# Altium PCB FMC-320U-A2.PcbDoc
Units mm, origin at the board's own origin, x right, y up, seen from the top; angles counter-clockwise.
Board outline 106 x 84 mm, 2 copper layers (Top Layer, Bottom Layer), stack 1.672 mm thick; 69 components, 47 nets, 200 pads, 43 vias.
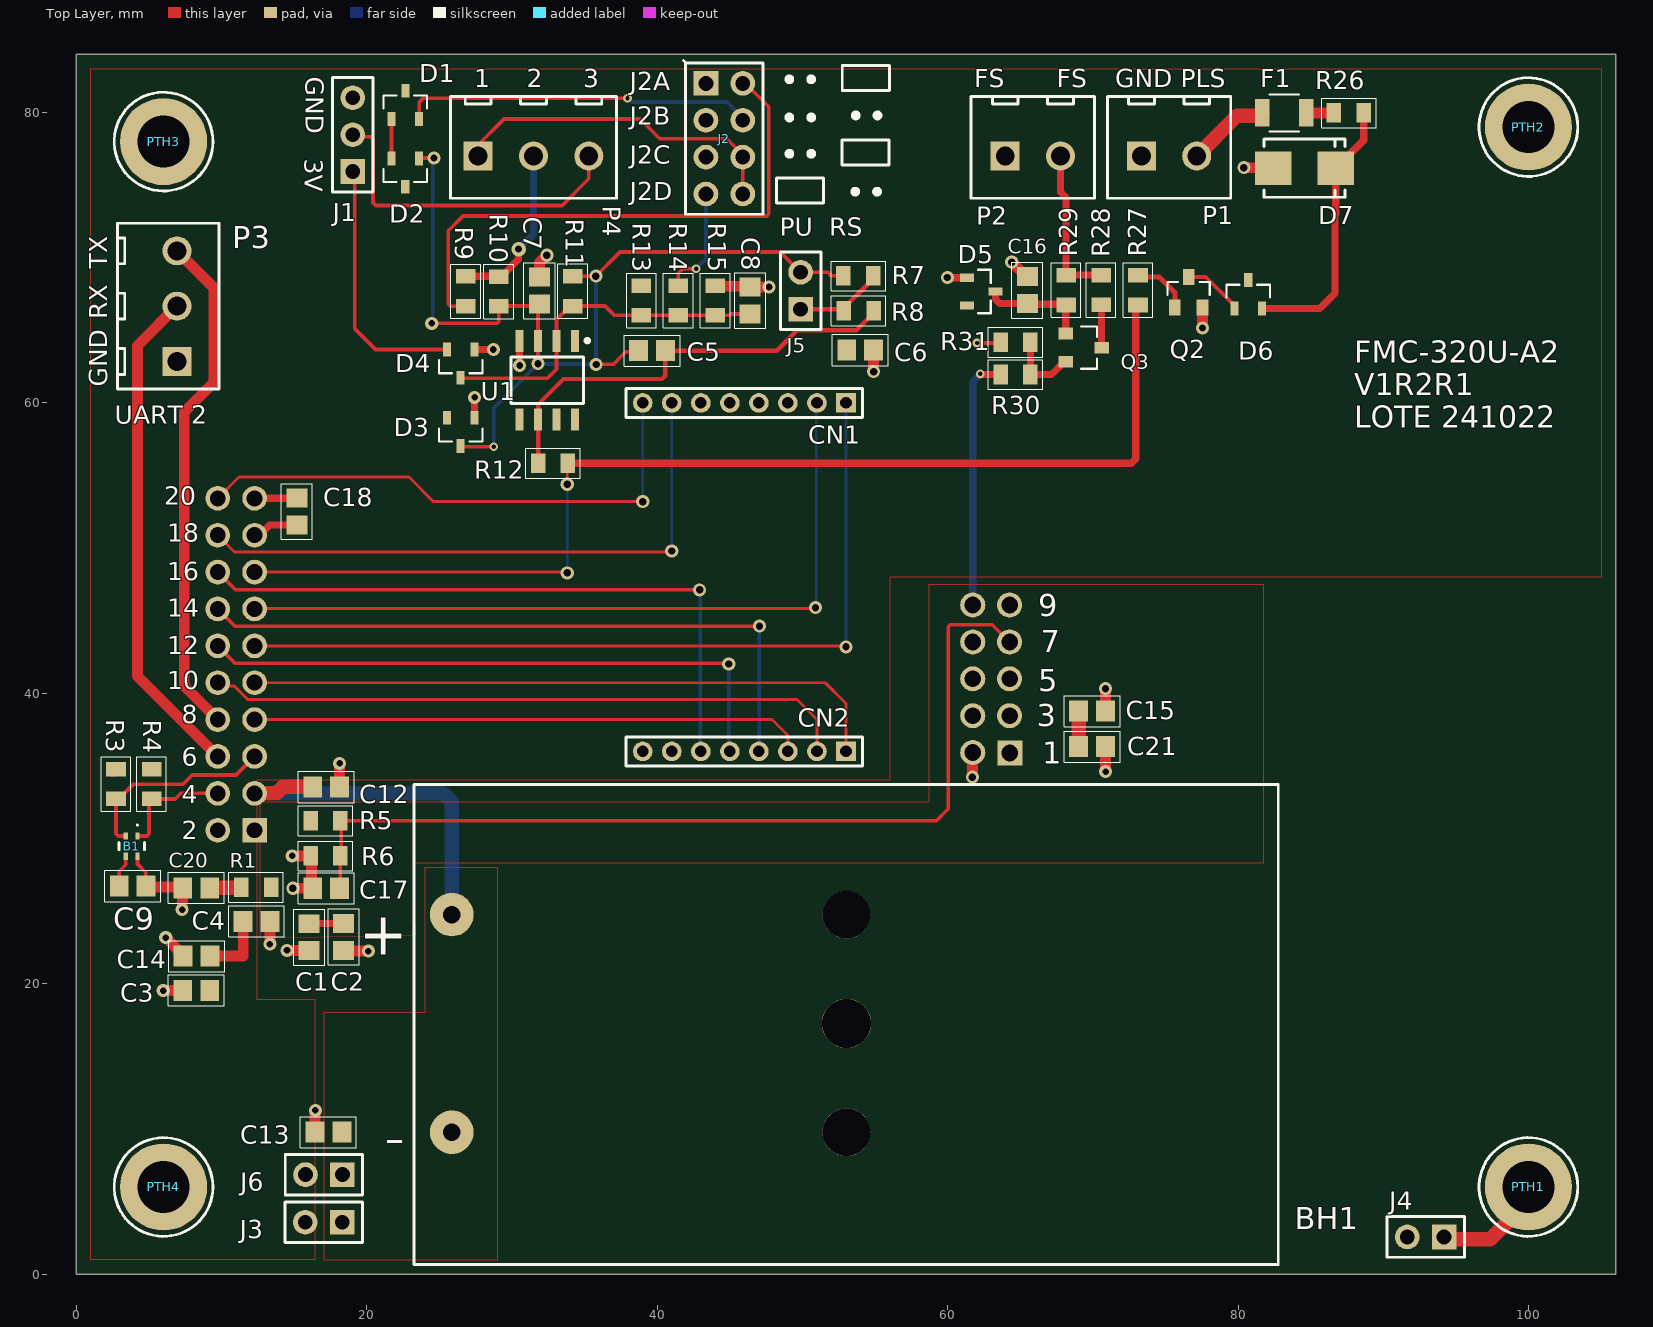
[diagram p0: Top Layer view]
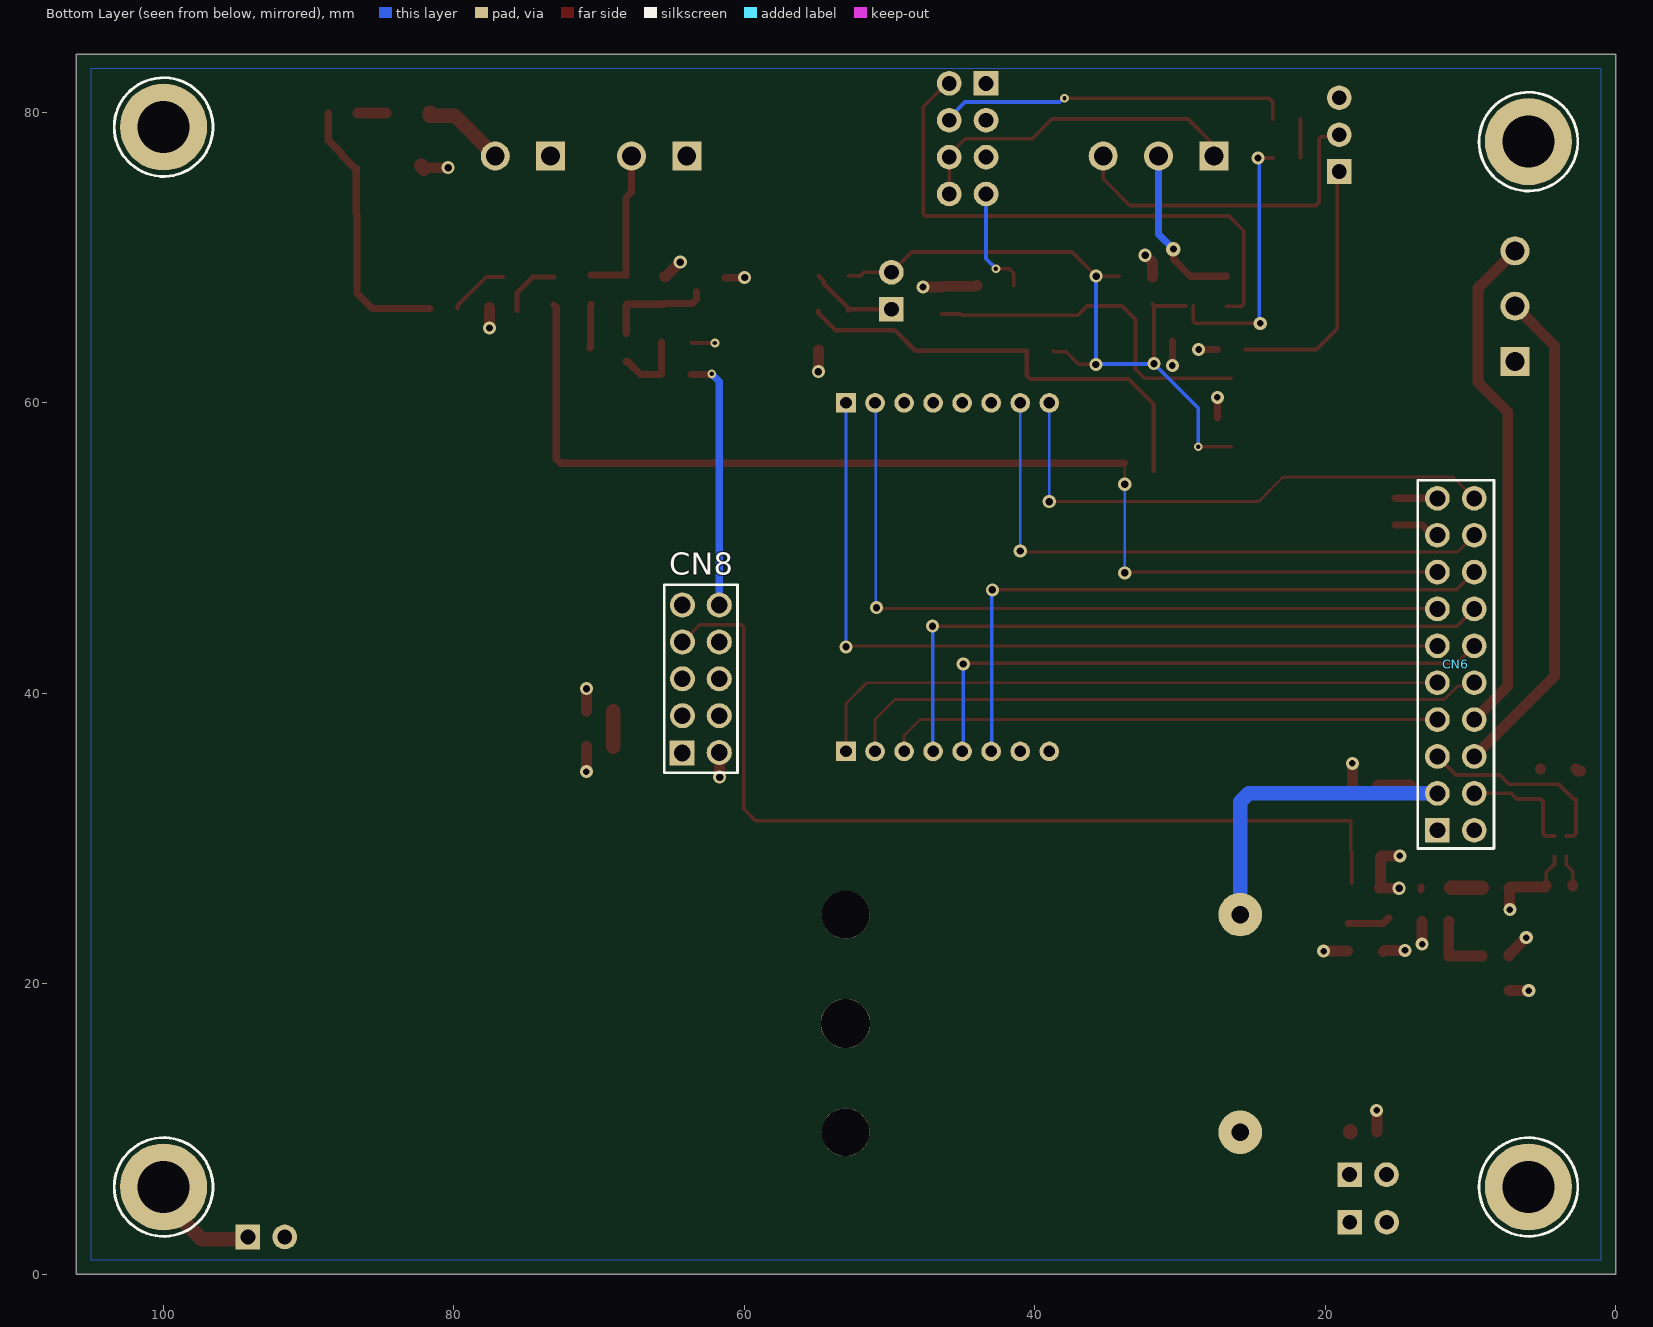
[diagram p1: Bottom Layer view, seen from below]

## Layer stack, top to bottom
Top Solder: solder mask 0.1, Solder Resist, Dk 3.5
Top Layer: signal copper 0.036
Dielectric 1: dielectric 1.6, FR-4, Dk 4.8
Bottom Layer: signal copper 0.036
Bottom Solder: solder mask 0.1, Solder Resist, Dk 3.5

## Board outline
0,0 0,84 106,84 106,0

## Design rules (kind name [scope] priority, off if disabled: settings)
AssemblyTestPointUsage [All] p0: scope1count=1 scope1_0_kind=Board scope1_0_value=Board scope2count=1 scope2_0_kind=Board scope2_0_value=Board commentlength=0
AssemblyTestpoint [All] p0: scope1count=1 scope1_0_kind=Board scope1_0_value=Board scope2count=1 scope2_0_kind=Board scope2_0_value=Board commentlength=0
BoardOutlineClearance [All] p0: scope1count=1 scope1_0_kind=Board scope1_0_value=Board scope2count=1 scope2_0_kind=Board scope2_0_value=Board commentlength=0 gap=0.25
BoardOutlineClearance [All] p1: gap=0.25 ignorepadtopadclearanceinfootprint=FALSE
Clearance [All] p0: scope1count=1 scope1_0_kind=Board scope1_0_value=Board scope2count=1 scope2_0_kind=Board scope2_0_value=Board commentlength=0 gap=0.2
Clearance [All] p1: gap=0.2 ignorepadtopadclearanceinfootprint=FALSE
ComponentClearance [All] p0: scope1count=1 scope1_0_kind=Board scope1_0_value=Board scope2count=1 scope2_0_kind=Board scope2_0_value=Board commentlength=0 gap=0.099 collisioncheckmode=3
ComponentClearance [All] p1: gap=0.099 collisioncheckmode=3 verticalgap=0.099 showdistances=FALSE
DiffPairsRouting [All] p0: scope1count=1 scope1_0_kind=Board scope1_0_value=Board scope2count=1 scope2_0_kind=Board scope2_0_value=Board commentlength=0
FabricationTestPointUsage [All] p0: scope1count=1 scope1_0_kind=Board scope1_0_value=Board scope2count=1 scope2_0_kind=Board scope2_0_value=Board commentlength=0 valid=0 allowmultiple=FALSE
FabricationTestpoint [All] p0: scope1count=1 scope1_0_kind=Board scope1_0_value=Board scope2count=1 scope2_0_kind=Board scope2_0_value=Board commentlength=0 side=3 testpointundercomponent=TRUE minsize=1.016 maxsize=2.54 preferedsize=1.524 minholesize=0 maxholesize=1.016 preferedholesize=0.813 testpointgrid=0.025
FanoutControl Fanout_BGA [All] p0 off: scope1count=1 scope1_0_kind=Board scope1_0_value=Board scope2count=1 scope2_0_kind=Board scope2_0_value=Board commentlength=69 // Protel DXP Scope 1 Expression Was: IsBGA   Fanout_BGA (Default Rule)
FanoutControl Fanout_LCC [All] p0 off: scope1count=1 scope1_0_kind=Board scope1_0_value=Board scope2count=1 scope2_0_kind=Board scope2_0_value=Board commentlength=69 // Protel DXP Scope 1 Expression Was: IsLCC   Fanout_LCC (Default Rule)
FanoutControl Fanout_SOIC [All] p0 off: scope1count=1 scope1_0_kind=Board scope1_0_value=Board scope2count=1 scope2_0_kind=Board scope2_0_value=Board commentlength=71 // Protel DXP Scope 1 Expression Was: IsSOIC   Fanout_SOIC (Default Rule)
FanoutControl Fanout_Small [All] p0 off: scope1count=1 scope1_0_kind=Board scope1_0_value=Board scope2count=1 scope2_0_kind=Board scope2_0_value=Board commentlength=84 // Protel DXP Scope 1 Expression Was: (CompPinCount < 5)   Fanout_Small (Default Rule)
FanoutControl Fanout_Default [All] p0: scope1count=1 scope1_0_kind=Board scope1_0_value=Board scope2count=1 scope2_0_kind=Board scope2_0_value=Board commentlength=30 // Fanout_Default (Default Rule)
Height [All] p0: scope1count=1 scope1_0_kind=Board scope1_0_value=Board scope2count=1 scope2_0_kind=Board scope2_0_value=Board commentlength=0
HoleSize [All] p0: scope1count=1 scope1_0_kind=Board scope1_0_value=Board scope2count=1 scope2_0_kind=Board scope2_0_value=Board commentlength=0 absolutevalues=TRUE maxlimit=10 minlimit=0.3 maxpercent=80.000 minpercent=20.000
HoleSize [All] p1: absolutevalues=TRUE maxlimit=10 minlimit=0.3 maxpercent=80.000 minpercent=20.000
HoleToHoleClearance [All] p0: scope1count=1 scope1_0_kind=Board scope1_0_value=Board scope2count=1 scope2_0_kind=Board scope2_0_value=Board commentlength=0
LayerPairs [All] p0: scope1count=1 scope1_0_kind=Board scope1_0_value=Board scope2count=1 scope2_0_kind=Board scope2_0_value=Board commentlength=0 enforce=TRUE
MinimumSolderMaskSliver [All] p0: scope1count=1 scope1_0_kind=Board scope1_0_value=Board scope2count=1 scope2_0_kind=Board scope2_0_value=Board commentlength=0
MinimumSolderMaskSliver [All] p1: minsoldermaskwidth=0.2
NetAntennae [All] p0: scope1count=1 scope1_0_kind=Board scope1_0_value=Board scope2count=1 scope2_0_kind=Board scope2_0_value=Board commentlength=0
PasteMaskExpansion [All] p0: scope1count=1 scope1_0_kind=Board scope1_0_value=Board scope2count=1 scope2_0_kind=Board scope2_0_value=Board commentlength=0 expansion=0
PlaneClearance [All] p0: scope1count=1 scope1_0_kind=Board scope1_0_value=Board scope2count=1 scope2_0_kind=Board scope2_0_value=Board commentlength=0 clearance=0.25
PlaneClearance [All] p1: clearance=0.25
PlaneConnect [All] p0: scope1count=1 scope1_0_kind=Board scope1_0_value=Board scope2count=1 scope2_0_kind=Board scope2_0_value=Board commentlength=0 planeconnectstyle=Relief reliefexpansion=0.508 reliefentries=4 reliefconductorwidth=0.254 reliefairgap=0.254
PolygonConnect [All] p0: scope1count=1 scope1_0_kind=Board scope1_0_value=Board scope2count=1 scope2_0_kind=Board scope2_0_value=Board commentlength=0 connectstyle=Relief reliefconductorwidth=0.254 reliefentries=4 polygonreliefangle="90 Angle"
PolygonConnect [All] p1: connectstyle=Relief reliefconductorwidth=0.254 reliefentries=4 polygonreliefangle="90 Angle" airgapwidth=0.254
RoutingCorners [All] p0: scope1count=1 scope1_0_kind=Board scope1_0_value=Board scope2count=1 scope2_0_kind=Board scope2_0_value=Board commentlength=0 cornerstyle=45-Degree minsetback=2.54 maxsetback=2.54
RoutingLayers [All] p0: scope1count=1 scope1_0_kind=Board scope1_0_value=Board scope2count=1 scope2_0_kind=Board scope2_0_value=Board commentlength=0 top layer=Automatic bottom layer=Automatic
RoutingPriority [All] p0: scope1count=1 scope1_0_kind=Board scope1_0_value=Board scope2count=1 scope2_0_kind=Board scope2_0_value=Board commentlength=0
RoutingTopology [All] p0: scope1count=1 scope1_0_kind=Board scope1_0_value=Board scope2count=1 scope2_0_kind=Board scope2_0_value=Board commentlength=0 topology=Shortest
RoutingVias [All] p0: scope1count=1 scope1_0_kind=Board scope1_0_value=Board scope2count=1 scope2_0_kind=Board scope2_0_value=Board commentlength=0 holewidth=0.5 width=1 viastyle="Through Hole" minholewidth=0.3 minwidth=0.6 maxholewidth=0.9 maxwidth=1.2
RoutingVias [All] p1: holewidth=0.5 width=1 viastyle="Through Hole" minholewidth=0.3 minwidth=0.6 maxholewidth=0.9 maxwidth=1.2
ShortCircuit [All] p0: scope1count=1 scope1_0_kind=Board scope1_0_value=Board scope2count=1 scope2_0_kind=Board scope2_0_value=Board commentlength=0 allowed=FALSE
SilkToBoardRegionClearance [All] p0: scope1count=1 scope1_0_kind=Board scope1_0_value=Board scope2count=1 scope2_0_kind=Board scope2_0_value=Board commentlength=0
SilkToSilkClearance [All] p0: scope1count=1 scope1_0_kind=Board scope1_0_value=Board scope2count=1 scope2_0_kind=Board scope2_0_value=Board commentlength=0
SilkToSilkClearance [All] p1: silktosilkclearance=0.2
SilkToSolderMaskClearance [All] p0 off: scope1count=1 scope1_0_kind=Board scope1_0_value=Board scope2count=1 scope2_0_kind=Board scope2_0_value=Board commentlength=44 // Protel DXP Scope 1 Expression Was: IsPad
SilkToSolderMaskClearance [IsPad] p1: minsilkscreentomaskgap=0.2 clearancetoexposedcopper=TRUE
SolderMaskExpansion [All] p0: scope1count=1 scope1_0_kind=Board scope1_0_value=Board scope2count=1 scope2_0_kind=Board scope2_0_value=Board commentlength=0 expansion=0.102
SolderMaskExpansion [All] p1: expansion=0.102 istentingtop=FALSE
UnRoutedNet [All] p0: scope1count=1 scope1_0_kind=Board scope1_0_value=Board scope2count=1 scope2_0_kind=Board scope2_0_value=Board commentlength=0
UnpouredPolygon [All] p0: scope1count=1 scope1_0_kind=Board scope1_0_value=Board scope2count=1 scope2_0_kind=Board scope2_0_value=Board commentlength=0
Width [All] p0: scope1count=1 scope1_0_kind=Board scope1_0_value=Board scope2count=1 scope2_0_kind=Board scope2_0_value=Board commentlength=0 maxlimit=5 minlimit=0.2 preferedwidth=0.2
Width [All] p1: maxlimit=5 minlimit=0.2 preferedwidth=0.2
24 further rules are at their usual default settings.

## Components (designator, comment, footprint, x,y, rotation, side; value= is the part's Value field where it differs from the comment)
B1 "STS40-BD1B-R3" STS40BD1BR3 3.8,29.475 r270 top
BH1 "ENERGIZER L91" BATTERY_HOLDER_2XAA 53,17.25 r180 top
C1 "4.7uF" CAP_SM0805_YAGEOCC2_N 16.025,23.202 r270 top
C2 "100nF" CAP_SM0805_YAGEOCC2_N 18.4,23.225 r270 top
C3 "4.7uF" CAP_SM0805_YAGEOCC2_N 8.25,19.544 r180 top
C4 "100nF" CAP_SM0805_YAGEOCC2_N 12.4,24.3 r0 top
C5 "33pF" CAP_SM0805_YAGEOCC2_N 39.648,63.6 r0 top
C6 "1uF" CAP_SM0805_YAGEOCC2_N 53.976,63.649 r0 top
C7 "47nF" CAP_SM0805_YAGEOCC2_N 31.887,67.74 r90 top
C8 "47nF" CAP_SM0805_YAGEOCC2_N 46.402,67.056 r90 top
C9 "100nF" CAP_SM0805_YAGEOCC2_N 3.873,26.725 r180 top
C12 "100nF" CAP_SM0805_YAGEOCC2_N 17.198,33.55 r0 top
C13 "4.7uF" CAP_SM0805_YAGEOCC2_N 17.35,9.775 r180 top
C14 "100nF" CAP_SM0805_YAGEOCC2_N 8.275,21.9 r180 top
C15 "100nF" CAP_SM0805_YAGEOCC2_N 69.952,38.775 r0 top
C16 "100nF" CAP_SM0805_YAGEOCC2_N 65.49,67.772 r90 top
C17 "4.7uF" CAP_SM0805_YAGEOCC2_N 17.198,26.575 r180 top
C18 "4.7uF" CAP_SM0805_YAGEOCC2_N 15.175,52.525 r90 top
C20 "4.7uF" CAP_SM0805_YAGEOCC2_N 8.25,26.6 r180 top
C21 "4.7uF" CAP_SM0805_YAGEOCC2_N 69.952,36.325 r0 top
CN1 "DW200R-11-08-43" DW200R-11-08-43 46,60 r180 top
CN2 "DW200R-11-08-43" DW200R-11-08-43 46,36 r180 top
CN6 "DZ254R-22-20-63" "HEADER PIN 2X10" 11,42 r90 bottom locked
CN8 "" "HEADER PIN 2X5 MIRROR" 63,41 r270 bottom locked
D1 "BAV23S" BAV23S 22.65,80.521 r90 top
D2 "BAV23S" BAV23S 22.648,75.869 r270 top
D3 "BAV23S" BAV23S 26.459,58.008 r270 top
D4 "BAV23S" BAV23S 26.459,62.707 r270 top
D5 "BAV23S" BAV23S 62.315,67.67 r0 top
D6 "BAV23S" BAV23S 80.704,67.482 r90 top
D7 "SMBJ28CA-13-F" SMBJ28CA-13-F 84.58,76.165 r0 top
F1 "0ZCJ0005FF2E" 0ZCJ0005FF2E 83.183,79.975 r0 top
J1 "" "HEADER PIN 1X3" 19.025,78.475 r90 top
J2 "Usar equivalente" "HEADER PIN 2X4" 44.624,78.2 r270 top
J3 "Usar Equivalente" "HEADER PIN 1X2" 17.03,3.575 r180 top
J4 "Usar Equivalente" "HEADER PIN 1X2" 92.924,2.557 r180 top
J5 "Usar Equivalente" "HEADER PIN 1X2" 49.875,67.725 r90 top
J6 "Usar Equivalente" "HEADER PIN 1X2" 17.045,6.85 r180 top
P1 "WJ15EDGVC-3.81-2P" "HEADER PLUG 2" 75.25,77 r0 top
P2 "WJ15EDGVC-3.81-2P" "HEADER PLUG 2" 65.87,77 r0 top
P3 "WJ15EDGVC-3.81-3P" "HEADER PLUG 3" 6.925,66.665 r90 top
P4 "WJ15EDGVC-3.81-3P" "HEADER PLUG 3" 31.475,77 r0 top
PTH1 "PTH-3MM-M" PTH_M3_M 100,6 r0 top
PTH2 "PTH-3MM-M" PTH_M3_M 100,79 r0 top
PTH3 "PTH-3MM-M" PTH_M3_M 6,78 r0 top
PTH4 "PTH-3MM-M" PTH_M3_M 6,6 r0 top
Q2 "DMG3402" DMG3402L-7 76.6,67.575 r90 top
Q3 "DMG3401" DMG3401LSN-7 69.529,63.807 r0 top
R1 "10R" RES_SM0805_YAGEORC_N 12.375,26.65 r0 top
R3 "10K" RES_SM0805_YAGEORC_N 2.725,33.752 r90 top
R4 "10K" RES_SM0805_YAGEORC_N 5.175,33.75 r90 top
R5 "10M" RES_SM0805_YAGEORC_N 17.148,31.225 r180 top
R6 "10M" RES_SM0805_YAGEORC_N 17.148,28.8 r0 top
R7 "1M" RES_SM0805_YAGEORC_N 53.85,68.75 r0 top
R8 "1M" RES_SM0805_YAGEORC_N 53.872,66.355 r0 top
R9 "100K" RES_SM0805_YAGEORC_N 26.807,67.691 r270 top
R10 "10K" RES_SM0805_YAGEORC_N 29.093,67.679 r270 top
R11 "220K" RES_SM0805_YAGEORC_N 34.173,67.702 r90 top
R12 "1K" RES_SM0805_YAGEORC_N 32.816,55.854 r0 top
R13 "1M" RES_SM0805_YAGEORC_N 38.909,67.056 r90 top
R14 "10K" RES_SM0805_YAGEORC_N 41.449,67.056 r270 top
R15 "1M" RES_SM0805_YAGEORC_N 43.989,67.056 r270 top
R26 "47R" RES_SM0805_YAGEORC_N 87.628,79.975 r180 top
R27 "10K" RES_SM0805_YAGEORC_N 73.11,67.772 r90 top
R28 "1M" RES_SM0805_YAGEORC_N 70.57,67.783 r270 top
R29 "100K" RES_SM0805_YAGEORC_N 68.157,67.772 r270 top
R30 "1K" RES_SM0805_YAGEORC_N 64.677,61.957 r180 top
R31 "1M" RES_SM0805_YAGEORC_N 64.677,64.182 r0 top
U1 "MCP6541" MCP6541-E/SN 32.428,61.564 r270 top

## Footprints (in the part's own frame and the unit in brackets; to place one, negate y for a bottom-side part, rotate by r counter-clockwise, add the part's x,y. Pads: shape width x height; smd on the part's side, far side on the other; paste and mask are expansions set on the pad)
0ZCJ0005FF2E [mm]
  rect 1x1.9 smd: 1(-1.5,0) 2(1.5,0)
  silkscreen extent -1.02,-1.27 1.02,1.27
BATTERY_HOLDER_2XAA [mm]
  round 3 hole 1.2 mask+0: NEG(27.15,7.481) POS(27.15,-7.509)
  round 3.3 hole 3.3 unplated mask+0: ""(-0.03,7.481) ""(-0.03,-7.509)
  round 3.4 hole 3.4 unplated mask+0: ""(-0.03,-0.014)
  silkscreen extent -29.77,-16.47 29.74,16.59
BAV23S [mm]
  rect 0.95x0.56 smd: 1(-0.975,0.95) 2(-0.975,-0.95) 3(0.975,0)
  silkscreen extent -0.23,-1.5 0.66,1.5
CAP_SM0805_YAGEOCC2_N [mm] "Capacitor, Yageo CC Class2, SM0805, IPC Medium Density"
  rect 1.3x1.45 smd: 1(-0.927,0) 2(0.927,0)
  silkscreen extent -1.92,-1.07 1.92,1.07
DMG3401LSN-7 [mm]
  rect 1x0.8 smd: D(1.1,0) G(-1.4,0.975) S(-1.4,-0.975)
  silkscreen extent -0.35,-1.45 0.75,1.45
DMG3402L-7 [mm]
  rect 1.1x0.8 smd: D(1.1,0) G(-1,0.95) S(-1,-0.95)
  silkscreen extent -0.13,-1.45 0.75,1.45
DW200R-11-08-43 [mm]
  rect 1.35x1.35 hole 0.8: 1(-7,0)
  round 1.35 hole 0.8: 2(-5,0) 3(-3,0) 4(-1,0) 5(1,0) 6(3,0) 7(5,0) 8(7,0)
  silkscreen extent -8.15,-1 8.15,1
"HEADER PIN 1X2" [mm]
  rect 1.7x1.7 hole 1.02: 1(-1.27,0)
  round 1.7 hole 1.02: 2(1.27,0)
  silkscreen extent -2.67,-1.4 2.67,1.4
"HEADER PIN 1X3" [mm]
  rect 1.7x1.7 hole 1.02: 1(-2.54,0)
  round 1.7 hole 1.02: 2(0,0) 3(2.54,0)
  silkscreen extent -3.94,-1.4 3.94,1.4
"HEADER PIN 2X4" [mm]
  rect 1.7x1.7 hole 1.02: 1(-3.81,-1.27)
  round 1.7 hole 1.02: 2(-3.81,1.27) 3(-1.27,-1.27) 4(-1.27,1.27) 5(1.27,-1.27) 6(1.27,1.27) 7(3.81,-1.27) 8(3.81,1.27)
  silkscreen extent -5.38,-2.83 5.21,2.67
"HEADER PIN 2X5 MIRROR" [mm]
  rect 1.725x1.725 hole 1.15: 1(5.105,-1.28)
  round 1.725 hole 1.15: 2(5.08,1.27) 3(2.54,-1.27) 4(2.54,1.27) 5(0,-1.27) 6(0,1.27) 7(-2.54,-1.27) 8(-2.54,1.27) 9(-5.08,-1.27) 10(-5.08,1.27)
  silkscreen extent -6.48,-2.52 6.47,2.53
"HEADER PIN 2X10" [mm]
  rect 1.7x1.7 hole 1.1: 1(-11.43,1.27)
  round 1.7 hole 1.1: 2(-11.43,-1.27) 3(-8.89,1.27) 4(-8.89,-1.27) 5(-6.35,1.27) 6(-6.35,-1.27) 7(-3.81,1.27) 8(-3.81,-1.27) 9(-1.27,1.27) 10(-1.27,-1.27) 11(1.27,1.27) 12(1.27,-1.27) 13(3.81,1.27) 14(3.81,-1.27) 15(6.35,1.27) 16(6.35,-1.27) 17(8.89,1.27) 18(8.89,-1.27) 19(11.43,1.27) 20(11.43,-1.27)
  silkscreen extent -12.67,-2.63 12.67,2.63
"HEADER PLUG 2" [mm] "Connector; Header; 2 Position"
  rect 2x2 hole 1.3 mask+0: 1(-1.905,0)
  round 2 hole 1.3 mask+0: 2(1.905,0)
  silkscreen extent -4.25,-2.9 4.25,4.1
"HEADER PLUG 3" [mm] "Connector; Header; 3 Position"
  rect 2x2 hole 1.3 mask+0: 1(-3.81,0)
  round 2 hole 1.3 mask+0: 2(0,0) 3(3.81,0)
  silkscreen extent -5.71,-2.9 5.71,4.1
MCP6541-E/SN [mm]
  rect 1.5x0.55 smd: 1(-2.7,1.905) 2(-2.7,0.635) 3(-2.7,-0.635) 4(-2.7,-1.905) 5(2.7,-1.905) 6(2.7,-0.635) 7(2.7,0.635) 8(2.7,1.905)
  silkscreen extent -2.85,-2.5 1.6,2.88
PTH_M3_M [mm]
  round 6 hole 3.6: 1(0,0)
  silkscreen extent -3.4,-3.4 3.4,3.4
RES_SM0805_YAGEORC_N [mm] "Resistor, Yageo RC_L, SM0805, IPC Medium Density"
  rect 1x1.35 smd: 1(-1.027,0) 2(1.027,0)
  silkscreen extent -1.88,-1.02 1.88,1.02
SMBJ28CA-13-F [mm]
  rect 2.5x2.3 smd: A(-2.15,0) K(2.15,0)
  silkscreen extent -2.8,-2 2.8,2
STS40BD1BR3 [mm]
  rect 0.5x0.3 smd: 1(-0.7,0.4) 2(-0.7,-0.4) 3(0.7,-0.4) 4(0.7,0.4)
  silkscreen extent -1.5,-0.88 0.25,0.89

## Part data
B1: "Board Mount Temperature Sensors Base Accuracy Version, I2C Address 0x45"
BH1: library part 2462, "2 x AA through hole economic type"
C1 C3 C13 C17 C18 C20 C21: library part CC0805KRX5R6BB475, "CAP 4.7uF SM0805 X5R 10V YAGEO CC2"
C2 C4 C9 C12 C14 C15 C16: library part CC0805KRX7R8BB104, "CAP 100nF SM0805 X7R 25V YAGEO CC2"
C5: library part CC0805JRNPO9BN330, "CAP 33pF SM0805 NPO 50V YAGEO CC2"
C6: library part CC0805KKX7R8BB105, "CAP 1uF SM0805 X7R 25V YAGEO CC2"
C7 C8: library part CC0805KRX7R8BB473, "CAP 47nF SM0805 X7R 25V YAGEO CC2"
CN1 CN2: "1 x 8 - tru hole 2mm - altura 4.3mm"
CN6: "2 x 10 - true hole 2.54mm"
CN8: library part DZ254R-22-10-63, "2 x 5 - true hole 2.54mm"
D1 D2 D3 D4 D5 D6: "DIODE ARRAY GP 250V 200MA SOT23"
F1: "PTC RESET FUSE 60V 50MA 1206"
J1: library part 54101-T0600LF-03, "1 x 3 - Cuttable - true hole  2.54mm - Pb free"
J2: library part 54102-T0604LF-JUMPER, "2 x 4  - true hole  2.54mm"
J3 J4 J5 J6: library part 54101-T0602LF, "1 x 2 - true hole  2.54mm - Pb free"
P1 P2: "TERM BLOK FEMALE 1X2 3.81MM"
P3 P4: "TERM BLOK FEMALE 1X3 3.81MM"
PTH1 PTH2 PTH3 PTH4: "Agujero de montaje metalizado roscas M3. Drill de tamaño medio."
Q2: library part DMG3402L-7, "N-CHANNEL ENHANCEMENT MODE FIELD EFFECT TRANSISTOR / 85m? @ VGS = 2.5V -> ID 2A / V(BR)DDS 30V"
Q3: library part DMG3401LSN-7, "P-CHANNEL ENHANCEMENT MODE MOSFET / RDS(ON) = 85m? @ VGS = -2.5V -> ID -2.7A / V(BR)DDS 30V"
R1: library part RC0805FR-0710RL, "RES 10R SM0805 YAGEO RC_L"
R3 R4 R10 R14 R27: library part RC0805FR-0710KL, "RES 10K SM0805 YAGEO RC_L"
R5 R6: library part RC0805FR-0710ML, "RES 10M SM0805 YAGEO RC_L"
R7 R8 R13 R15 R28 R31: library part RC0805FR-071ML, "RES 1M SM0805 YAGEO RC_L"
R9 R29: library part RC0805FR-07100KL, "RES 100K SM0805 YAGEO RC_L"
R11: library part RC0805FR-07220KL, "RES 220K SM0805 YAGEO RC_L"
R12 R30: library part RC0805FR-071KL, "RES 1K SM0805 YAGEO RC_L"
R26: library part RC0805FR-0747RL, "RES 47R SM0805 YAGEO RC_L"
U1: library part MCP6541-E/SN, "IC COMP PP I/O SNGL 1.6V 8SOIC"

## Via types
v1: diameter 0.9, hole 0.5, Top Layer to Bottom Layer, tented both sides, 23 vias
v2: diameter 0.9, hole 0.45, Top Layer to Bottom Layer, tented both sides, 14 vias
v3: diameter 0.6, hole 0.3, Top Layer to Bottom Layer, tented both sides, 5 vias
v4: diameter 1, hole 0.5, Top Layer to Bottom Layer, tented both sides, 1 vias

## Nets (pads, with @x,y where several pads share a name; then routed paths per layer and width w, separated by ;. In a path a pad name is that pad's centre, name@x,y a point inside that pad or via, vN(x,y) a via of type N, cw(c..) or ccw(c..) an arc to the next point about the centre after c; other vN are vias at no path point)
ADC_IN3: CN8.6
ADC_IN4: CN8.4
AVDD: C1.1 C2.1 C15.1 C21.1 CN8.1 R1.2 R5.2 | length 6.1
  Top Layer w0.5: R1.2@13.402,26.475 R1.2 ; C1.1@15.625,24.529 C1.1 ; C1.1@15.648,24.529 C1.1@16.025,24.152 ; C1.1@16.048,24.152 C2.1
  Top Layer w1: C21.1 C15.1
BATTERY_LEVEL: C17.1 CN8.7 R5.1 R6.2 | length 63.8
  Top Layer w0.254: C17.1@18.177,26.925 18.177,29.05 18.227,29.1 18.227,31.225 59.225,31.225 60.05,32.05 60.05,44.576 60.203,44.729 63.081,44.729 CN8.7
Blindaje: J4.1 PTH1.1 | length 7.9
  Top Layer w1: J4.1 94.351,2.4 97.375,2.4 100,5.025 PTH1.1
DVDD: B1.3 C3.1 C4.1 C6.1 C9.2 C14.1 C18.1 C20.1 CN2.7 CN6.1 CN6.17 D3.2 D4.2 D5.2 J1.1 J2.1 J2.3 J3.2 Q3.D R1.1 R3.2 R4.2 R13.2 R28.2 U1.7 | length 33.3
  Top Layer w0.22: C9.2@2.946,26.8 2.946,27.746 3.4,28.2 B1.3
  Top Layer w0.254: J1.1@19.175,75.9 19.175,65.1 20.593,63.682 D4.2
  Top Layer w0.5: CN6.17 12.595,50.89 13.303,51.598 C18.1 ; R28.2 70.599,66.727 70.599,63.836 Q3.D
  Top Layer w0.75: R3.2@2.425,34.654 2.6,34.654 R3.2 R3.2@2.726,34.778 ; C9.2 C9.2@2.946,26.8 ; R4.2 R4.2 ; C14.1 11.487,21.9 11.487,24.286 C4.1 ; CN6.1@12.259,30.559 CN6.1
  Top Layer w1: C20.1@9.202,26.625 R1.1@11.323,26.625
FLOW_DETECTOR: CN8.10 R30.2 | length 17.6
  Top Layer w0.5: v3(62.25,61.998) 62.277,61.998 62.318,61.957 R30.2
  Bottom Layer w0.5: CN8.10 61.73,61.478 v3(62.25,61.998)
FLOW_SWITCH: P2.2 R28.1 R29.1 | length 10.8
  Top Layer w0.5: P2.2 67.775,74.525 68.157,74.143 R29.1 68.162,68.805 70.564,68.805 R28.1
GND: B1.4 BH1.NEG C1.2 C2.2 C3.2 C4.2 C6.2 C7.2 C8.2 C9.1 C12.2 C13.2 C14.2 C15.2 C16.2 C17.2 C18.2 C20.2 C21.2 CN2.8 CN6.2 CN6.19 CN8.2 D3.1 D4.1 D5.1 D7.A J1.3 J2.5 J4.2 J6.2 P1.1 P2.1 P3.1 Q2.S R6.1 R15.1 R31.1 U1.4 | length 49.9
  Top Layer w0.254: B1.4 4.2,28.25 4.768,27.682 4.768,26.757 C9.1 ; C3.2 C3.2@7.325,19.542 ; C20.2 C20.2@7.325,26.598 ; C4.2 C4.2@13.35,24.277 ; C1.2@15.975,22.225 C1.2 ; C2.2 C2.2@18.448,22.25 ; v3(62.029,64.132) 63.6,64.132 R31.1 ; D7.A@82.27,76.325 D7.A
  Top Layer w0.5: CN6.19 15.153,53.43 C18.2 ; D3.1 v2@27.409,60.37 ; D4.1 27.411,63.68 28.717,63.68 v2(28.718,63.679) ; v2@30.521,62.582 U1.4@30.521,64.261 ; v1@59.991,68.62 D5.1
  Top Layer w0.75: C9.1@4.775,26.775 C9.1@4.788,26.762 ; C9.1 4.862,26.662 7.261,26.662 C20.2 ; v2(5.975,19.525) 5.984,19.534 7.317,19.534 C3.2@7.325,19.542 ; v2(6.15,23.173) 7.348,21.975 C14.2 ; v2(7.275,25.1) 7.299,25.124 7.299,26.572 C20.2@7.325,26.598 ; v2(13.325,22.725) v2(13.325,22.725) 13.326,24.253 C4.2@13.35,24.277 ; v2(14.5,22.3) 14.512,22.288 15.913,22.288 C1.2@15.975,22.225 ; v2(14.85,28.8) R6.1 16.196,28.725 16.196,26.65 C17.2 v1(14.9,26.575) ; C13.2 16.437,9.788 16.437,11.261 v2(16.45,11.275) ; C12.2 v2(18.125,35.175) ; C2.2@18.448,22.25 v2(20.1,22.25) ; v2@27.414,60.374 v2(27.418,60.379) ; v2(30.518,62.579) v2@30.521,62.582 ; C7.2 31.887,69.665 v1(32.393,70.171) ; R15.1@44,68.094 R15.1 44.039,68.033 46.352,68.033 C8.2 v1(47.7,67.983) ; v1(54.903,62.153) C6.2 ; v1(59.979,68.632) v1@59.991,68.62 ; v1(61.7,34.225) 61.715,34.24 61.715,35.905 CN8.2 ; v1@64.417,69.697 65.415,68.699 C16.2 ; v2(70.879,34.604) C21.2 ; C15.2 v1(70.879,40.321) ; Q2.S 77.552,66.573 77.552,65.159 v1(77.554,65.157) ; v1(80.4,76.2) 81.985,76.2 D7.A@82.065,76.12
  Top Layer w1: D7.A@82.065,76.12 D7.A@82.27,76.325
  other v1: 64.415,69.697
I2C1_SCL: B1.2 CN6.5 R3.1 | length 13.9
  Top Layer w0.25: B1.2 2.871,30.175 2.725,30.321 R3.1 2.9,32.725 3.925,33.75 7.35,33.75 7.975,34.375 10.995,34.375 CN6.5
I2C1_SDA: B1.1 CN6.4 R4.1 | length 8.1
  Top Layer w0.25: B1.1 4.854,30.175 5,30.321 5,32.548 R4.1 6.798,32.723 7.185,33.11 CN6.4
NetC5_1: C5.1 C7.1 D2.1 D3.3 J5.2 R7.1 R10.2 R11.2 U1.3 | length 67.3
  Top Layer w0.254: D2.1 23.629,76.875 v1(24.625,76.875) ; v2(24.468,65.479) 28.944,65.479 29.093,65.628 R10.2@29.093,66.675 ; D3.3@26.459,56.992 v3(28.745,56.992) ; R10.2@29.601,66.675 31.749,66.675 C7.1@31.793,66.719 ; v1(31.793,62.707) U1.3 C7.1@31.793,66.719 ; C7.1 C7.1@31.793,66.719 ; R11.2 v1(35.768,68.729) 37.439,70.4 48.47,70.4 J5.2 51.757,68.995 52.002,68.75 R7.1 ; v1(35.793,62.654) 36.965,62.654 37.839,63.528 38.649,63.528 C5.1
  Bottom Layer w0.254: v2(24.468,65.479) 24.547,65.557 24.547,76.797 v1(24.625,76.875) ; v3(28.745,56.992) 28.745,59.659 v1(31.793,62.707) 31.82,62.68 35.767,62.68 v1(35.793,62.654) 35.781,62.666 35.781,68.716 v1(35.768,68.729)
NetC5_2: C5.2 R8.2 R12.1 U1.6 | length 31.5
  Top Layer w0.254: R8.2 R8.2@54.925,66.381
  Top Layer w0.3: R12.1@31.793,55.319 U1.6 31.793,59.9 33.543,61.65 40.325,61.65 40.551,61.876 40.551,63.576 C5.2 48.225,63.6 49.624,64.999 53.718,64.999 54.899,66.18 R8.2
NetC8_1: C8.1 D4.3 R11.1 R13.1 R14.2 R15.2 U1.2 | length 24.3
  Top Layer w0.254: D4.3@26.459,61.691 32.428,61.691 33.063,62.326 U1.2 33.063,65.74 33.998,66.675 36.403,66.675 37.049,66.029 R13.1 R14.2 R15.2 44.994,66.029 45.094,66.129 C8.1
NetC16_1: C16.1 D5.3 Q3.G R29.2 | length 7.5
  Top Layer w0.5: D5.3 63.29,67.138 63.583,66.845 C16.1 65.54,66.795 68.107,66.795 R29.2 68.143,66.731 68.143,64.796 Q3.G
NetD1_1: D1.1 D2.2 | length 2.7
  Top Layer w0.254: D2.2@21.7,76.879 D1.1
NetD1_2: D1.2 J2.4 | length 24.1
  Top Layer w0.254: D1.2 23.6,80.7 23.875,80.975 v3(37.95,80.975)
  Bottom Layer w0.254: v3(37.95,80.975) 38.022,80.975 38.272,80.725 44.798,80.725 J2.4@45.894,79.629
NetD6_1: D6.1 Q2.D | length 4.2
  Top Layer w0.254: Q2.D 77.781,68.675 79.754,66.702 D6.1
NetD6_2: D6.2 D7.K R26.1 | length 18.8
  Top Layer w0.5: D6.2 85.632,66.507 86.675,67.55 86.675,72.976 86.73,73.031 D7.K 86.83,76.165 87.73,77.065 87.73,77.165 88.655,78.09 R26.1
NetF1_2: F1.2 R26.2 | length 1.9
  Top Layer w0.75: F1.2 R26.2
NetJ1_2: J1.2 P4.3 | length 24
  Top Layer w0.254: J1.2 19.157,78.343 20.276,78.343 20.425,78.194 20.425,73.8 20.625,73.6 33.45,73.6 35.285,75.435 P4.3@35.285,77.775
NetJ2_2: J2.2 R9.2 | length 38.7
  Top Layer w0.254: R9.2 25.751,66.664 25.602,66.813 25.602,71.852 26.627,72.877 47.523,72.877 47.672,73.026 47.672,80.391 J2.2@45.894,82.169
NetJ2_6: J2.6 J2.8 P4.1 | length 22.5
  Top Layer w0.254: P4.1@27.665,77.775 29.44,79.55 38.825,79.55 40.175,78.2 44.783,78.2 45.894,77.089 J2.8@45.894,74.549
NetJ2_7: J2.7 R14.1 | length 7.8
  Top Layer w0.254: R14.1 41.449,68.931 41.768,69.25 v3(42.675,69.25)
  Bottom Layer w0.254: v3(42.675,69.25) 43.354,69.929 J2.7@43.354,74.549
NetJ5_1: J5.1 R7.2 R8.1 | length 6.1
  Top Layer w0.3: J5.1 R8.1@52.745,66.455 ; R8.1 52.845,66.53 54.527,68.212 54.527,68.4 R7.2
NetP4_2: P4.2 R9.1 R10.1 | length 11.7
  Top Layer w0.5: R9.1 26.812,68.723 R10.1@29.093,68.723 ; R10.1 29.268,68.706 30.45,69.888 v4(30.45,70.6)
  Bottom Layer w0.5: v4(30.45,70.6) 31.475,71.625 P4.2
NetQ2_G: Q2.G R27.2 | length 4.2
  Top Layer w0.35: R27.2@73.11,68.672 74.578,68.672 75.65,67.6 Q2.G@75.65,66.375
NetQ3_S: Q3.S R30.1 R31.2 | length 5
  Top Layer w0.5: R31.2 R30.1 67.154,61.957 68.029,62.832 Q3.S
PA0: CN2.2 CN6.10 | length 44.5
  Top Layer w0.2: CN6.10 9.966,40.494 10.88,40.494 11.794,39.58 49.62,39.58 51,38.2 CN2.2
PA8: CN2.6 CN6.16 | length 44.9
  Top Layer w0.254: CN6.16 10.955,47.125 v1(42.925,47.125)
  Bottom Layer w0.254: v1(42.925,47.125) 42.962,47.088 42.962,36.037 CN2.6
PB10: CN8.5
PB11: CN8.9
PC8: CN1.8 CN6.20 | length 37.4
  Top Layer w0.2: CN6.20 11.2,54.9 22.9,54.9 24.6,53.2 v1(39,53.2)
  Bottom Layer w0.2: v1(39,53.2) CN1.8
PC9: CN1.7 CN6.18 | length 42
  Top Layer w0.2: CN6.18 10.88,49.74 40.94,49.74 v1(41,49.8)
  Bottom Layer w0.2: v1(41,49.8) CN1.7
PD7: CN2.3 CN6.7 | length 38.3
  Top Layer w0.2: CN6.7 47.91,38.19 49,37.1 CN2.3
PULSE_OUT: F1.1 P1.2 | length 5.9
  Top Layer w1: P1.2 79.948,79.793 81.683,79.793 F1.1
PULSE_OUT_CMP: CN6.15 R12.2 R27.1 | length 79
  Top Layer w0.2: CN6.15 33.75,48.35 v1(33.8,48.3) ; v1(33.8,54.4) 33.8,55.811 R12.2
  Top Layer w0.5: R12.2 72.657,55.854 72.95,56.147 72.95,66.585 R27.1
  Bottom Layer w0.2: v1(33.8,48.3) v1(33.8,54.4)
RTD_IN: CN8.8
SPI3_MISO: CN1.1 CN6.11 | length 57.6
  Top Layer w0.2: CN6.11 52.93,43.27 v1(53,43.2)
  Bottom Layer w0.2: v1(53,43.2) CN1.1
SPI3_MOSI: CN2.1 CN6.9 | length 44.6
  Top Layer w0.2: CN6.9 51.57,40.73 53,39.3 CN2.1
SPI3_SCK: CN1.2 CN6.13 | length 52.8
  Top Layer w0.2: CN6.13 12.315,45.855 50.855,45.855 v1(50.9,45.9)
  Bottom Layer w0.2: v1(50.9,45.9) 50.95,45.95 50.95,59.95 CN1.2
USART2_RX: CN6.6 P3.2 | length 34.4
  Top Layer w0.75: P3.2 4.2,63.94 4.2,41.18 CN6.6
USART2_TX: CN6.8 P3.3 | length 35.1
  Top Layer w0.75: P3.3 9.475,67.925 9.475,61.425 7.425,59.375 7.425,40.495 CN6.8
USART3_RX: CN2.4 CN6.14 | length 46.5
  Top Layer w0.254: CN6.14 10.915,44.625 v1(47.05,44.625)
  Bottom Layer w0.254: CN2.4 47.025,36.025 47.025,44.6 v1(47.05,44.625)
USART3_TX: CN2.5 CN6.12 | length 41.9
  Top Layer w0.254: CN6.12 10.925,42.075 44.875,42.075 v1(44.925,42.025) v1@44.925,42.075
  Bottom Layer w0.254: v1@44.925,42.075 v1(44.925,42.025) 44.925,36.075 CN2.5
VDD: BH1.POS C12.1 C13.1 CN6.3 J3.1 J6.1 | length 25.9
  Top Layer w0.5: J6.1@18.277,6.888 J6.1 ; J3.1 J3.1@18.315,3.59
  Top Layer w1: CN6.3 13.76,33.11 14.2,33.55 C12.1 ; C13.1 C13.1@18.277,9.85
  Bottom Layer w1: CN6.3 25.264,33.11 25.85,32.524 BH1.POS
VREF: CN8.3
pads on no net: BH1. CN1.3 CN1.4 CN1.5 CN1.6 D1.3 D2.3 D6.3 PTH2.1 PTH3.1 PTH4.1 U1.1 U1.5 U1.8

## Polygon pours and split planes (outlines as drawn)
DVDD on Top Layer "DVDD_L01_P015" (solid, pour order 15): 12.425,18.917 16.425,18.917 16.425,1 9,1 1,1 1,27.8 1,31.125 1,83 105,83 105,48 56,48 56,34 12.425,34
VDD on Top Layer "VDD_L01_P017" (solid, pour order 17): 17.037,1 29,1 29,28 24,28 24,18 17.037,18
AVDD on Top Layer "AVDD_L01_P014" (solid, pour order 14): 23.193,28.308 23.302,23.302 12.65,23.148 12.65,32.525 58.75,32.525 58.75,47.525 81.75,47.525 81.75,28.308
GND on Bottom Layer "GND_L02_P016" (solid, pour order 16): 1,1 1,83 105,83 105,1

## Silkscreen, mask and mechanical layers (free items; w line width, h text height)
Top Overlay:
  circle w0.4: c53.64,74.55 r0.135
  circle w0.4: c55.14,74.55 r0.135
  circle w0.4: c53.665,79.8 r0.135
  circle w0.4: c55.165,79.8 r0.135
  circle w0.4: c50.6,79.663 r0.135
  circle w0.4: c50.6,82.288 r0.135
  circle w0.4: c49.1,77.162 r0.135
  circle w0.4: c50.6,77.162 r0.135
  circle w0.4: c49.1,79.663 r0.135
  circle w0.4: c49.1,82.288 r0.135
  lines w0.2: 48.2,73.775 48.2,75.5 51.45,75.5 51.45,73.775 48.2,73.775 ; 52.715,76.388 55.965,76.388 55.965,78.112 52.715,78.112 52.715,76.388 ; 52.74,81.512 55.99,81.512 55.99,83.237 52.74,83.237 52.74,81.512
  text "GND" at 15.775,82.475 h1.25 r270
  text "1" at 27.4,81.75 h1.25
  text "2" at 31.025,81.75 h1.25
  text "3" at 34.9,81.75 h1.25
  text "FS" at 61.85,81.75 h1.25
  text "FS" at 67.5,81.75 h1.25
  text "GND" at 71.55,81.75 h1.25
  text "PLS" at 76.05,81.75 h1.25
  text "J2A" at 38.095,81.546 h1.25
  text "J2B" at 38.095,79.146 h1.25
  text "3V" at 15.725,76.825 h1.25 r270
  text "J2C" at 38.095,76.475 h1.25
  text "J2D" at 38.095,73.95 h1.25
  text "PU  RS" at 48.45,71.5 h1.25
  text "TX" at 2.125,69.225 h1.25 r90
  text "RX" at 2.125,65.75 h1.25 r90
  text "GND" at 2.125,61.125 h1.25 r90
  text "UART 2" at 2.65,58.55 h1.25
  text "FMC-320U-A2 / V1R2R1 / LOTE 241022" at 88,58.275 h1.5
  text "20" at 6.05,52.975 h1.25
  text "18" at 6.25,50.45 h1.25
  text "16" at 6.25,47.8 h1.25
  text "9" at 66.229,45.304 h1.52
  text "14" at 6.25,45.275 h1.25
  text "7" at 66.404,42.829 h1.52
  text "12" at 6.25,42.7 h1.25
  text "10" at 6.25,40.275 h1.25
  text "5" at 66.254,40.154 h1.52
  text "8" at 7.25,37.925 h1.25
  text "3" at 66.129,37.729 h1.52
  text "1" at 66.504,35.154 h1.52
  text "6" at 7.25,35 h1.25
  text "4" at 7.25,32.425 h1.25
  text "2" at 7.25,29.95 h1.25
Top Courtyard:
  lines w0.508: 117.65,38.605 188.655,38.645 ; 138.65,32.875 138.65,49.875 ; 167.7,32.93 167.7,38.645 ; 188.655,32.875 117.65,32.875 117.65,49.875 ; 188.655,49.875 117.65,49.875 ; 188.76,32.875 188.76,56.875 117.65,56.875 117.65,49.875
  text "FLOWMEET S.R.L." at 134.045,51.406 h5.08
  text "Software" at 140.65,46.903 h2.54
  text "Board ID" at 118.65,46.901 h2.54
  text "Altium Designer v20.2.4" at 142.65,42.591 h3.81
  text "FMC-320U-A2" at 118.63,41.959 h3
  text "Date" at 118.65,36.624 h1.91
  text "File Name" at 140.65,36.624 h1.91
  text "Engineer" at 168.97,36.463 h1.91
  text "4/11/2023" at 120.65,33.903 h2.54
  text "FMC-320U-A2.PcbDoc" at 142.65,33.903 h2.54
  text "DHS" at 170.24,33.593 h2.54
  text "Notes:" at 111.55,25.45 h2.5
  text "1) SMD diodes/LEDs mark is for CATHODE." at 114.854,21.679 h1.52
  text "2) All capacitors are ceramic with no polarity." at 114.704,19.062 h1.52

## Text inside footprints (layer, text, board x,y; h text height)
B1: Top Assembly "Uar Equivalente" at 57.425,52.265 h1.52 r180
BH1: Top Overlay "-" at 22.63,11.094 h5 r180; Top Overlay "+" at 22.8,25.5 h5 r180